# EAGLE board PIC_WIFI_DEV (EAGLE 6.2)
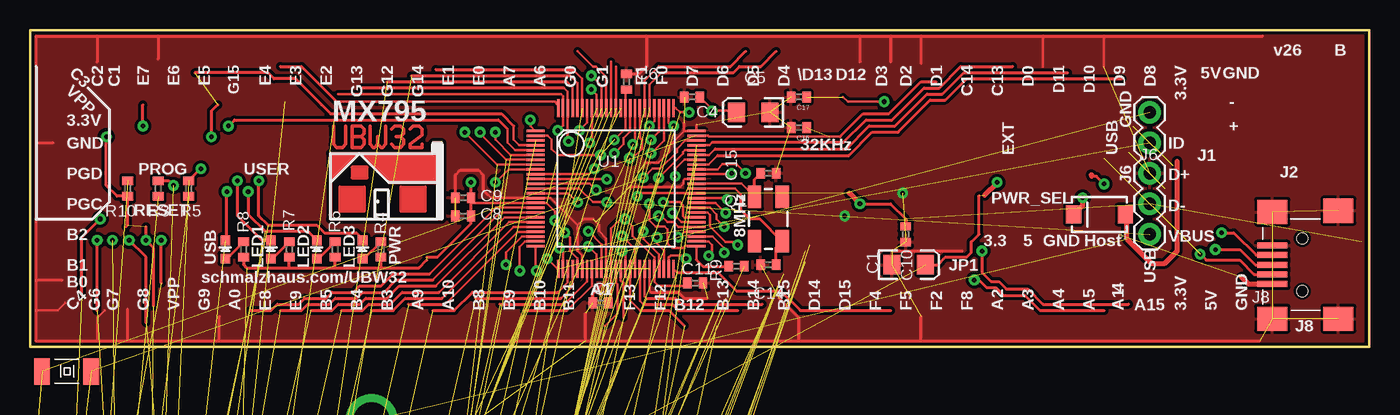
[diagram p0: board, top side]
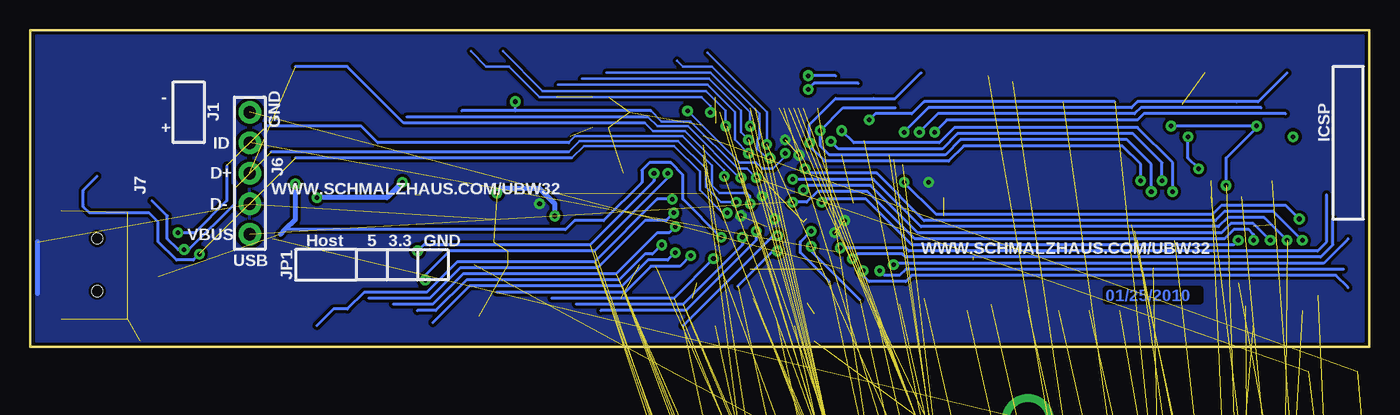
[diagram p1: board, bottom side, seen from below]

Size 111.51 x 26.42 mm. Coordinates in mm from the lower left corner, seen from the top.
Outline: 0,26.42 111.51,26.42 111.51,0 0,0 0,26.42
Copper layers (1*16): Top 0.035mm / dielectric 1.5mm / Bottom 0.035mm
Design rules: minimum track width 7mil, minimum drill 15mil, track to track 8mil, track to pad 8mil, pad to pad 8mil, via to via 8mil, smd to smd 8mil, copper to edge 10mil, drill to drill 8mil, minimum pad ring 12mil, minimum via ring 10mil, stop-mask expansion 4mil, vias tented up to drill 25mil, thermal gap 10mil

## Footprints (pad centres in the part's own frame; a part is rotated, then mirrored left to right if it is on the bottom)
EIA3216 = smd 1.4 x 1.6: A 1.4,0; C -1.4,0
C0402 = smd 0.7 x 0.9: 1 -0.65,0; 2 0.65,0
0603-CAP = smd 1.1 x 1: 1 -0.85,0; 2 0.85,0
SMA-DIODE = smd 1.27 x 1.47: A -2.15,0; C 2.15,0
M1206 = smd 1.6 x 2: 1 -1.4,0; 2 1.4,0
POWER_JACK_PTH = drill 2.997 pad 4.318: GND 0,7.7; GNDBREAK 4.7,10.7; PWR 0,13.7
1X05 = drill 1.016 pad 1.88: 1 0,0; 2 2.54,0; 3 5.08,0; 4 7.62,0; 5 10.16,0
USB-MINIB = smd 2.5 x 0.5: D+ 2.5,0; D- 2.5,0.8; GND 2.5,-1.6; ID 2.5,-0.8; VBUS 2.5,1.6 | smd 2.5 x 2: G1 -3,4.5; G2 2.5,4.5; G3 -3,-4.5; G4 2.5,-4.4 | hole 0.9: 0,2.2; 0,-2.2
1X02 = drill 1.016 pad 1.88: 1 0,0; 2 2.54,0
1X20 = drill 1.016 pad 1.88 square: 1 0,0 | drill 1.016 pad 1.88: 2 2.54,0; 3 5.08,0; 4 7.62,0; 5 10.16,0; 6 12.7,0; 7 15.24,0; 8 17.78,0; 9 20.32,0; 10 22.86,0; 11 25.4,0; 12 27.94,0; 13 30.48,0; 14 33.02,0; 15 35.56,0; 16 38.1,0; 17 40.64,0; 18 43.18,0; 19 45.72,0; 20 48.26,0
1X16 = drill 1.016 pad 1.88: 1 0,0; 2 2.54,0; 3 5.08,0; 4 7.62,0; 5 10.16,0; 6 12.7,0; 7 15.24,0; 8 17.78,0; 9 20.32,0; 10 22.86,0; 11 25.4,0; 12 27.94,0; 13 30.48,0; 14 33.02,0; 15 35.56,0; 16 38.1,0
1X15 = drill 1.016 pad 1.88: 1 0,0; 2 2.54,0; 3 5.08,0; 4 7.62,0; 5 10.16,0; 6 12.7,0; 7 15.24,0; 8 17.78,0; 9 20.32,0; 10 22.86,0; 11 25.4,0; 12 27.94,0; 13 30.48,0; 14 33.02,0; 15 35.56,0
LED-0603 = smd 0.8 x 0.8: A 0,-0.75; C 0,0.75
CRYSTAL-SMD-5X3 = smd 1.9 x 1.1: 1 -1.85,-1.15; 2 1.85,-1.15; 3 1.85,1.15; 4 -1.85,1.15
CRYSTAL-SMD-4X2 = smd 1.3 x 2.2: P$1 -2.05,0; P$2 2.05,0
0603-RES = smd 1.1 x 1: 1 -0.85,0; 2 0.85,0
SWITCH-OMRON = smd 1.6 x 1.4: 1 4,-2.25; 2 -4,-2.25; 3 4,2.25; 4 -4,2.25
TQFP100 = smd 0.2 x 1.5: 1 -4.8,-6.7; 2 -4.4,-6.7; 3 -4,-6.7; 4 -3.6,-6.7; 5 -3.2,-6.7; 6 -2.8,-6.7; 7 -2.4,-6.7; 8 -2,-6.7; 9 -1.6,-6.7; 10 -1.2,-6.7; 11 -0.8,-6.7; 12 -0.4,-6.7; 13 0,-6.7; 14 0.4,-6.7; 15 0.8,-6.7; 16 1.2,-6.7; 17 1.6,-6.7; 18 2,-6.7; 19 2.4,-6.7; 20 2.8,-6.7; 21 3.2,-6.7; 22 3.6,-6.7; 23 4,-6.7; 24 4.4,-6.7; 25 4.8,-6.7; 51 4.8,6.7; 52 4.4,6.7; 53 4,6.7; 54 3.6,6.7; 55 3.2,6.7; 56 2.8,6.7; 57 2.4,6.7; 58 2,6.7; 59 1.6,6.7; 60 1.2,6.7; 61 0.8,6.7; 62 0.4,6.7; 63 0,6.7; 64 -0.4,6.7; 65 -0.8,6.7; 66 -1.2,6.7; 67 -1.6,6.7; 68 -2,6.7; 69 -2.4,6.7; 70 -2.8,6.7; 71 -3.2,6.7; 72 -3.6,6.7; 73 -4,6.7; 74 -4.4,6.7; 75 -4.8,6.7 | smd 1.5 x 0.2: 26 6.7,-4.8; 27 6.7,-4.4; 28 6.7,-4; 29 6.7,-3.6; 30 6.7,-3.2; 31 6.7,-2.8; 32 6.7,-2.4; 33 6.7,-2; 34 6.7,-1.6; 35 6.7,-1.2; 36 6.7,-0.8; 37 6.7,-0.4; 38 6.7,0; 39 6.7,0.4; 40 6.7,0.8; 41 6.7,1.2; 42 6.7,1.6; 43 6.7,2; 44 6.7,2.4; 45 6.7,2.8; 46 6.7,3.2; 47 6.7,3.6; 48 6.7,4; 49 6.7,4.4; 50 6.7,4.8; 76 -6.7,4.8; 77 -6.7,4.4; 78 -6.7,4; 79 -6.7,3.6; 80 -6.7,3.2; 81 -6.7,2.8; 82 -6.7,2.4; 83 -6.7,2; 84 -6.7,1.6; 85 -6.7,1.2; 86 -6.7,0.8; 87 -6.7,0.4; 88 -6.7,0; 89 -6.7,-0.4; 90 -6.7,-0.8; 91 -6.7,-1.2; 92 -6.7,-1.6; 93 -6.7,-2; 94 -6.7,-2.4; 95 -6.7,-2.8; 96 -6.7,-3.2; 97 -6.7,-3.6; 98 -6.7,-4; 99 -6.7,-4.4; 100 -6.7,-4.8
RECOM = drill 1.016 long: GND 0,-2.54; VIN -2.54,-2.54; VOUT 2.54,-2.54
SMD_MRF = smd 0.85 x 0.8: 1 0.2,-1.73; 2 0.2,-3; 3 0.2,-4.27; 4 0.2,-5.54; 5 0.2,-6.81; 6 0.2,-8.08; 7 0.2,-9.35; 8 0.2,-10.62; 9 0.2,-11.89; 10 0.2,-13.16; 11 0.2,-14.43; 12 0.2,-15.7; 13 0.2,-16.97; 14 0.2,-18.24; 15 0.2,-19.51; 16 0.2,-20.78; 17 0.2,-22.05; 18 0.2,-23.32; 19 20.8,-23.32; 20 20.8,-22.05; 21 20.8,-20.78; 22 20.8,-19.51; 23 20.8,-18.24; 24 20.8,-16.97; 25 20.8,-15.7; 26 20.8,-14.43; 27 20.8,-13.16; 28 20.8,-11.89; 29 20.8,-10.62; 30 20.8,-9.35; 31 20.8,-8.08; 32 20.8,-6.81; 33 20.8,-5.54; 34 20.8,-4.27; 35 20.8,-3; 36 20.8,-1.73
SD_ALPS = smd 0.9 x 2.1: 1 6.255,22.6; 2 3.755,22.6; 3 1.255,22.6; 4 -1.245,22.6; 5 -3.745,22.6; 6 -6.245,22.6; 7 -8.67,22.6; 8 -10.37,22.6; 9 8.755,22.6 | smd 4.32 x 3.2: 12 -11.69,-3.05; 13 12.09,-3.05 | smd 0.8 x 1.2: CD -11.97,22.45 | smd 1.13 x 0.9: VSS -13.285,14.88 | smd 1.13 x 1.5: WP -13.285,1.57 | hole 1.4: 11.97,0; -11.97,0

## Placement (x,y rotation side)
C1  10uF  [EIA3216]  73.15,6.86 0 top
C4  0.1uF  [C0402]  55.12,20.83 180 top
C5  10uF  [EIA3216]  60.2,19.56 180 top
C6  0.1uF  [C0402]  49.66,22.1 90 top
C7  0.1uF  [C0402]  47.5,3.68 180 top
C8  0.1uF  [C0402]  36.07,10.92 180 top
C9  0.1uF  [C0402]  36.07,12.45 180 top
C10  0.1uF  [C0402]  72.9,9.4 270 top
C11  0.1uF  [C0402]  55.37,5.33 0 top
C14  18pF  [C0402]  61.47,6.86 0 top
C15  18pF  [C0402]  61.47,14.48 180 top
C16  11pf  [C0402]  64.01,18.29 180 top
C17  11pf  [C0402]  64.01,20.83 180 top
C19  1uF  [0603-CAP]  1.78,-50.29 0 top  (outside the outline)
D1  [SMA-DIODE]  89.03,11.05 180 top
F2  500mA PTC Fuse  [M1206]  18.29,-40.13 0 top  (outside the outline)
J5  POWER_JACKPTH  [POWER_JACK_PTH]  28.45,-19.81 0 top  (outside the outline)
J6  [1X05]  93.22,9.4 90 top
J8  [USB-MINIB]  105.92,6.86 180 top
JP1  [1X02]  1.78,-56.64 0 top  (outside the outline)
JP2  M20  [1X20]  -31.24,-167.13 0 top  (outside the outline)
JP3  M16PTH  [1X16]  -31.24,-197.61 0 top  (outside the outline)
JP4  M20  [1X20]  -31.24,-182.37 0 top  (outside the outline)
JP5  M15  [1X15]  -31.24,-189.99 0 top  (outside the outline)
LED1  WHITE  [LED-0603]  20.07,8.13 0 top
LED2  RED  [LED-0603]  23.88,8.13 0 top
LED3  YELLOW  [LED-0603]  27.69,8.13 0 top
PWR1  BLUE  [LED-0603]  9.4,-50.29 0 top  (outside the outline)
Q1  8MHz  [CRYSTAL-SMD-5X3]  61.47,10.67 90 top
Q2  32.768KHz  [CRYSTAL-SMD-4X2]  3.05,-2.03 0 top
R1  4.7K  [C0402]  1.78,-82.04 0 top  (outside the outline)
R2  4.7K  [C0402]  1.78,-85.85 0 top  (outside the outline)
R3  4.7K  [C0402]  10.67,13.21 90 top
R4  330  [C0402]  29.21,8.13 270 top
R5  4.7K  [C0402]  13.21,13.21 90 top
R6  330  [C0402]  25.4,8.13 270 top
R7  330  [C0402]  21.59,8.13 270 top
R8  330  [C0402]  17.78,8.13 270 top
R9  4.7K  [C0402]  58.8,6.73 0 top
R10  4.7K  [C0402]  8.13,13.21 270 top
R11  4.7K  [C0402]  1.78,-89.66 0 top  (outside the outline)
R12  4.7K  [0603-RES]  33.53,-130.3 0 top  (outside the outline)
R13  4.7K  [0603-RES]  37.34,-130.3 0 top  (outside the outline)
R14  4.7K  [0603-RES]  41.15,-130.3 0 top  (outside the outline)
R15  4.7K  [0603-RES]  1.78,-160.78 0 top  (outside the outline)
R16  4.7K  [0603-RES]  5.59,-160.78 0 top  (outside the outline)
R17  4.7K  [0603-RES]  9.4,-160.78 0 top  (outside the outline)
R18  4.7K  [0603-RES]  13.21,-160.78 0 top  (outside the outline)
R19  4.7K  [0603-RES]  17.02,-160.78 0 top  (outside the outline)
R20  4.7K  [C0402]  -32.51,-202.69 0 top  (outside the outline)
R50  330  [0603-RES]  5.59,-50.29 0 top  (outside the outline)
RESET  [SWITCH-OMRON]  5.59,-76.96 0 top  (outside the outline)
U1  PIC32MX460F512L TQFP100  [TQFP100]  48.77,13.21 270 top
U4  RECOM_X.X_REG78XX  [RECOM]  6.86,-28.7 0 top  (outside the outline)
U$1  MRF24WB0MA  [SMD_MRF]  -22.35,-121.41 0 top  (outside the outline)
U$2  SD_CARD_SOCKETALPS  [SD_ALPS]  17.02,-153.16 0 top  (outside the outline)
U$3  [UBW32]  29.59,17.91 0 top
U$5  [SCHMALZHAUS]  28.83,13.21 0 top
USB  GREEN  [LED-0603]  16.26,8.13 0 top
USER1  [SWITCH-OMRON]  5.59,-61.72 0 top  (outside the outline)
USER2  [SWITCH-OMRON]  5.59,-69.34 0 top  (outside the outline)

## Library data of the parts
C1 C5 C10 J8 = SparkFun02-20-08
C4 C6-C9 C11 C14-C17 LED1-LED3 PWR1 R1-R11 R20 USB = SparkFun
C19 R12-R19 R50 = SparkFun-Passives
D1 J6 = SparkFun-12-01-09
F2 = resistor
J5 Q2 RESET U4 U$1 U$2 USER1 USER2 = lizardworx
JP1-JP5 = SparkFun-Connectors
Q1 = SparkFun11_03_09
U1 = SchmalzHaus
U$3 U$5 = UBW32

## Nets
3.3V: C6.1 C7.1 C8.1 C9.1 C10.1 C11.1 F2.1 J6.2 JP3.2 JP5.14 R1.2 R2.2 R4.2 R6.2 R7.2 R8.2 R11.2 R12.2 R13.2 R14.2 R15.1 R16.2 R19.2 R20.2 R50.2 U1.2 U1.16 U1.30 U1.37 U1.46 U1.55 U1.62 U1.86 U$1.17 U$1.29 U$2.4
D+: J8.D+ U1.57
D-: J8.D- U1.56
GND: C1.C C4.2 C5.C C6.2 C7.2 C8.2 C9.2 C10.2 C11.2 C14.1 C15.1 C16.2 C17.2 C19.2 J5.GND J5.GNDBREAK J6.3 J8.G1 J8.G2 J8.G3 J8.G4 J8.GND JP1.2 JP3.1 JP5.15 PWR1.C R17.1 RESET.1 RESET.2 U1.15 U1.31 U1.36 U1.45 U1.65 U1.75 U4.GND U$1.1 U$1.10 U$1.18 U$1.19 U$1.25 U$1.28 U$1.30 U$1.36 U$2.3 U$2.6 U$2.12 U$2.VSS USER1.1 USER1.2 USER2.1 USER2.2
N$1: R1.1 R10.1
N$2: D1.A J5.PWR JP1.1
N$3: R2.1 R5.1
N$4: R3.1 R11.1
N$5: R15.2 U$1.4
N$6: R9.2 R20.1
N$10: R18.1 R19.1
N$19: PWR1.A R50.1
N$20: R8.1 USB.A
N$22: LED1.A R7.1
N$23: LED2.A R6.1
N$24: C19.1 F2.2 U4.VOUT
N$35: LED3.A R4.1
N$110: C4.1 C5.A U1.85
OSC1: C14.2 Q1.1 U1.63
OSC2: C15.2 Q1.3 U1.64
PGC: J6.5 U1.26
PGD: J6.4 U1.27
RA0: JP4.5 U1.17
RA1: JP4.16 U1.38
RA2: JP5.9 U1.58
RA4: JP5.10 U1.60
RA5: JP5.11 U1.61
RA6: JP2.4 U1.91
RA7: JP2.5 U1.92
RA9: JP4.10 U1.28
RA10: JP4.11 U1.29
RA14: JP5.12 U1.66
RA15: JP5.13 U1.67
RB0: U1.25
RB1: U1.24
RB2: U1.23
RB3: JP4.9 U1.22
RB4: JP4.8 U1.21
RB5: JP4.7 U1.20
RB8: JP4.12 U1.32
RB9: JP4.13 U1.33
RB10: JP4.14 U1.34
RB11: JP4.15 U1.35
RB12: JP4.19 U1.41
RB13: JP4.20 U1.42
RB14: JP5.1 U1.43
RB15: JP5.2 U1.44
RC1: JP2.18 U1.6
RC2: JP2.19 U1.7
RC3: JP2.20 U1.8
RC13: C17.1 JP3.6 Q2.P$2 U1.73
RC14: C16.1 JP3.7 Q2.P$1 U1.74
RD1: JP3.8 U1.76
RD2: JP3.9 U1.77
RD3: JP3.10 U1.78
RD4: JP3.13 U1.81
RD5: JP3.14 U1.82
RD6: JP3.15 U1.83
RD7: JP2.1 U1.84
RD8: JP3.3 U1.68
RD9: JP3.4 U1.69
RD11: JP3.5 U1.71
RD12: JP3.11 U1.79
RD13: JP3.12 U1.80
RD14: JP5.3 U1.47
RD15: JP5.4 U1.48
RE0: JP2.6 LED3.C U1.93
RE1: JP2.7 LED2.C U1.94
RE2: JP2.11 LED1.C U1.98
RE3: JP2.12 U1.99 USB.C
RE4: JP2.13 U1.100
RE5: JP2.15 U1.3
RE6: JP2.16 R5.2 U1.4 USER2.3 USER2.4
RE7: JP2.17 R3.2 U1.5 USER1.3 USER1.4
RE9: JP4.6 U1.19
RF2: JP5.7 U1.52
RF4: JP5.5 U1.49
RF5: JP5.6 U1.50
RF8: JP5.8 U1.53
RF12: JP4.18 U1.40
RF13: JP4.17 U1.39
RG0: JP2.3 U1.90
RG1: JP2.2 U1.89
RG9: JP4.4 U1.14
RG15: JP2.14 U1.1
SD_CD: JP2.9 U1.96 U$2.CD
SD_CK: JP4.1 U1.10 U$2.5
SD_CS: JP2.8 R18.2 U1.95 U$2.1
SD_DI: JP4.3 U1.12 U$2.2
SD_DO: JP4.2 U1.11 U$2.7
SD_WP: JP2.10 U1.97 U$2.WP
USBID: J8.ID R9.1 U1.51
VBUS: J8.VBUS U1.54
VIN_RAW: C1.A D1.C U4.VIN
VPP: J6.1 R10.2 RESET.3 RESET.4 U1.13
WF_CK: R13.1 U1.70 U$1.34
WF_CS: U1.59 U$1.23
WF_DI: R12.1 U1.72 U$1.35
WF_DO: U1.9 U$1.32
WF_HIBERNATE: U1.88 U$1.20
WF_INT: R14.1 U1.18 U$1.33
WF_RESET: R16.1 U1.87 U$1.7
WF_WP: R17.2 U$1.16

## Tracks (layer width: path | path; a pad name or v marks a point on that pad's centre or on a via)
3.3V  (via drill 0.38)  (27 unrouted)
  Top 0.203: v48.64,17.27 49.57,18.2 U1.86 49.57,21.36 arc-90 C6.1 | v43.69,10.54 43.69,11.3 42.98,12.01 U1.16 36.77,12.01 | v44.51,9.52 44.58,9.52 44.96,9.14 44.96,8 45.57,7.39 U1.30 | U1.2 43.1,17.61 43.43,17.27 43.43,16.51 43.94,16 v47.5,16 | 48.37,3.92 U1.37 48.37,9.89 49.15,10.67 v49.53,10.67 50.16,10.03 50.16,9.27 51.97,7.47 U1.46 51.97,5.44 52.32,5.08 54.48,5.08 54.74,5.33 C11.1 | U1.62 54.5,12.81 54.48,12.83 50.8,12.83 v50.55,12.57 | U1.55 54,10.01 53.59,10.41 53.09,10.41 52.58,10.92 v52.32,10.92
  Top 0.254: v36.7,13.72 36.72,13.7 C9.1 36.7,12.45 36.7,11.94 | 36.7,10.92 C8.1 | 36.7,10.92 36.7,11.94 | 36.7,11.94 36.77,12.01 | 36.7,10.92 36.7,10.29 33.91,7.49 33.02,7.49 | 21.59,6.6 25.4,6.6 | 25.4,6.6 29.21,6.6 | 33.02,7.24 32.38,6.6 29.21,6.6 | 29.21,6.6 R4.2 | 25.4,6.6 R6.2 | 21.59,6.6 R7.2 | R8.2 17.78,6.87 18.05,6.6 21.59,6.6 | C7.1 48.13,3.68 48.37,3.92 | 72.88,10.03 C10.1 72.9,10.67 71.63,11.94 v69.09,11.94
  Top 0.406: 68.2,12.83 v69.09,11.94
  Bottom 0.406: 110.87,4.45 110.87,8.76
  pour Bottom (isolate 0.254): 0.51,0.51 0.51,25.91 111,25.91 111,0.51
D+  (via drill 0.38)  (1 unrouted)
  Top 0.203: U1.57 54.47,10.81 54.36,10.92 54.36,11.81 54.1,12.07 v52.71,12.07
  Top 0.254: J8.D+ 101.98,6.86 100.71,8.13 v98.68,8.13
  Bottom 0.203: 66.67,16.26 65.76,17.17 57.56,17.17 55.25,14.86 55.25,13.34 53.98,12.07 v52.71,12.07
  Bottom 0.254: 66.67,16.26 91.44,16.26 | 94.49,13.21 94.49,11.94 98.3,8.13 v98.68,8.13 99.19,8.13 100.08,9.02 100.08,10.92 101.36,12.21
D-  (via drill 0.38)  (1 unrouted)
  Top 0.203: U1.56 54.23,10.41 v53.47,11.18
  Top 0.254: v97.41,7.75 97.92,7.24 100.71,7.24 101.89,6.06 J8.D-
  Bottom 0.203: 66.42,15.75 65.41,16.76 61.47,16.76 57.91,16.76 55.75,14.61 55.75,13.08 53.85,11.18 v53.47,11.18
  Bottom 0.254: 66.42,15.75 89.41,15.75 | 105.93,14.21 107.06,13.08 107.06,11.68 106.55,11.18 101.6,11.18 100.84,10.41 100.84,8.76 99.31,7.24 97.92,7.24 v97.41,7.75
GND  (via drill 0.38)  (50 unrouted)
  Top 0.203: 38.1,12.7 38.39,12.41 U1.15 43.35,12.41 45.59,10.16 | 46.86,4.45 47.97,5.55 U1.36 47.97,9.05 47.37,9.65 47.37,10.16 47.12,10.41 | U1.45 51.57,4.69 51.69,4.57 | 54.46,18.01 53.21,16.76 53.21,16.26 52.32,15.37 51.18,15.37 | U1.31 45.97,7.63 45.59,8 45.59,10.16 | 45.59,10.16 46.1,10.67 46.86,10.67 | 55.47,18.51 U1.75 54.46,18.01 | U1.65 54.54,14.01 54.39,13.86 54.39,13.63 54.1,13.34 49.91,13.34 | 54.46,18.01 54.46,18.68 | 89.41,25.91 89.41,23.37 | 84.33,25.91 84.33,23.37 | 5.59,0.51 5.59,2.41 6.22,3.05 | 0.51,3.05 2.29,3.05 2.92,3.68
  Top 0.254: C9.2 35.42,14.34 35.81,14.73 37.34,14.73 37.72,14.35 37.72,13.08 38.1,12.7 | C7.2 46.86,3.68 46.86,4.45 | 51.69,4.57 53.98,4.57 54.48,4.06 56.39,4.06 | C6.2 50.69,22.75 51.31,23.37 51.31,25.91 | 51.31,25.91 69.09,25.91 | 69.09,25.91 69.09,23.75 | 5.59,25.91 0.51,25.91 0.51,17.02 | 5.59,25.91 10.67,25.91 | 10.67,25.91 51.31,25.91 | 0.51,5.59 0.51,3.05 0.51,0.51 5.59,0.51 8.13,0.51 | 0.51,5.59 0.51,17.02 | 8.13,0.51 15.75,0.51 | 15.75,0.51 46.23,0.51 | 46.23,0.51 64.01,0.51 | 64.01,0.51 74.17,0.51 | 74.17,0.51 102.36,0.51 | 69.09,25.91 71.63,25.91 | 71.63,25.91 74.17,25.91 | 74.17,25.91 84.33,25.91 89.41,25.91 102.62,25.91 | 46.23,0.51 46.23,2.79 | 64.01,0.51 64.01,2.41 62.36,4.06 | 5.59,25.91 5.59,23.75 | 0.51,17.02 1.91,17.02 | 0.51,5.59 2.67,5.59 | 8.13,0.51 8.13,3.17 | 15.75,0.51 15.75,2.54 | 74.17,0.51 74.17,2.54 | 10.67,25.91 10.67,24 | 71.63,25.91 71.63,23.75 | 74.17,25.91 74.17,23.62 | 71.75,8 77.6,8
  Bottom 0.406: v67.82,10.92 67.82,11.94 69.09,13.21 72.26,13.21 v72.64,12.83
  pour Top (isolate 0.254, rank 2): 0.51,25.91 0.51,0.51 111,0.51 111,25.91
N$1  (1 unrouted)
N$2  (2 unrouted)
  Top 0.406: 95.5,15.49 95.5,8 94.49,6.99 93.34,6.99 91.31,9.02 91.31,10.91 D1.A
N$3  (1 unrouted)
N$4  (1 unrouted)
N$5  (1 unrouted)
N$6  (1 unrouted)
N$10  (1 unrouted)
N$19  (1 unrouted)
N$20
  Top 0.254: USB.A 16.39,7.38 17.78,8.76 17.65,8.76 17.67,8.78 R8.1
N$22
  Top 0.254: R7.1 21.59,8.76 20.2,7.38 LED1.A
N$23
  Top 0.254: R6.1 25.4,8.76 24.02,7.38 LED2.A
N$24  (2 unrouted)
N$35
  Top 0.254: R4.1 29.21,8.76 27.82,7.38 LED3.A
N$110  (via drill 0.38)
  Top 0.203: U1.85 49.97,17.96 49.4,17.4 49.4,16.89 v48.64,16.13 | C5.A 58.67,19.68 v56.77,19.68 56.77,19.83 C4.1
  Bottom 0.203: v48.64,16.13 48.64,15.88 49.66,14.86 50.55,14.86 51.05,15.37 52.45,15.37 v56.77,19.68
OSC1
  Top 0.203: U1.63 58.67,13.21 59.18,12.7
  Top 0.254: 59.18,12.7 59.18,11.43 59.94,10.67 60.77,10.67 Q1.1 62.12,8.32 C14.2
OSC2
  Top 0.203: U1.64 59.23,13.61 Q1.3
  Top 0.254: Q1.3 60.32,13.98 C15.2
PGC  (via drill 0.38)  (1 unrouted)
  Top 0.203: U1.26 43.92,6.5 v43.05,7.37
  Bottom 0.254: 3.05,10.67 3.05,8.51 4.06,7.49 38.61,7.49 38.86,7.75 42.67,7.75 v43.05,7.37
PGD  (via drill 0.38)  (1 unrouted)
  Top 0.203: U1.27 44.37,7.92 44.07,8.22 v44.07,8.25
  Bottom 0.254: v44.07,8.25 38.61,8.25 38.35,8 4.32,8 3.56,8.76 3.56,12.7
RA0  (1 unrouted)
  Top 0.203: U1.17 38.79,11.61 33.27,6.1
  Top 0.254: 33.27,6.1 30.23,6.1 29.21,5.08 27.43,5.08 26.92,4.57 25.15,4.57 24.64,4.06 22.86,4.06 22.35,3.56 20.57,3.56 20.07,3.05 18.29,3.05
RA1  (1 unrouted)
  Top 0.203: U1.38 48.77,5.33 48.9,5.21 48.9,2.79 47.88,1.78
RA2  (via drill 0.38)  (1 unrouted)
  Top 0.203: U1.58 56.39,11.21 56.61,10.98 56.61,10.07 57.91,8.76 58.67,8.76 v58.93,8.51
  Bottom 0.254: v58.93,8.51 59.69,7.75 60.33,7.75 62.48,5.59 75.18,5.59 77.72,3.05 79.25,3.05
RA4  (via drill 0.38)  (1 unrouted)
  Top 0.203: U1.60 57.08,12.01 v57.91,11.18
  Bottom 0.254: 83.31,4.06 78.23,4.06 75.69,6.6 64.26,6.6 60.33,10.54 58.55,10.54 v57.91,11.18
RA5  (via drill 0.38)  (1 unrouted)
  Top 0.203: U1.61 57.95,12.41 v58.04,12.32
  Bottom 0.254: v58.04,12.32 59.31,12.32 64.52,7.11 75.95,7.11 78.49,4.57 83.69,4.57 85.09,3.17 86.23,3.17 87.63,1.78
RA6  (via drill 0.38)  (1 unrouted)
  Top 0.203: U1.91 47.57,21.77 v46.74,22.61
  Bottom 0.254: 44.45,22.61 v46.74,22.61
RA7  (via drill 0.38)  (1 unrouted)
  Top 0.203: U1.92 47.17,21.03 v46.74,21.46
  Bottom 0.254: 42.55,21.97 46.23,21.97 v46.74,21.46
RA9  (1 unrouted)
  Top 0.203: U1.28 44.77,5.4 43.94,4.57
  Top 0.254: 43.94,4.57 36.83,4.57 35.31,3.05 33.53,3.05
RA10  (1 unrouted)
  Top 0.203: U1.29 45.17,5.04 44.2,4.06
  Top 0.254: 37.08,4.06 44.2,4.06
RA14  (via drill 0.38)  (1 unrouted)
  Top 0.203: U1.66 58.35,14.41 v58.42,14.48
  Top 0.254: 89.41,3.05 84.07,3.05 82.8,4.32 81.03,4.32 80.39,4.95 79.63,4.95 78.99,5.59 v78.61,5.59
  Bottom 0.254: v58.42,14.48 58.42,14.1 64.52,8 76.58,8 78.61,5.97 v78.61,5.59
RA15  (via drill 0.38)  (1 unrouted)
  Top 0.203: U1.67 57.23,14.81 57.66,15.24 58.8,15.24 v59.56,14.48
  Top 0.254: 91.44,3.56 84.33,3.56 83.06,4.83 81.28,4.83 80.64,5.46 80.01,5.46 79.25,6.22 v79.25,8
  Bottom 0.254: v59.56,14.48 59.56,13.84 64.9,8.51 78.74,8.51 v79.25,8
RB0  (via drill 0.38)
  Top 0.203: U1.25 42.07,6.45 v42.16,6.35
  Bottom 0.254: 1.78,4.95 2.79,5.97 38.1,5.97 38.61,5.46 41.66,5.46 42.16,5.97 v42.16,6.35
RB1  (via drill 0.38)
  Top 0.203: U1.24 41.22,8.81 40.77,8.36 v40.77,6.35
  Bottom 0.254: v40.77,6.35 40.39,5.97 39.12,5.97 38.61,6.48 2.16,6.48
RB2  (via drill 0.38)
  Top 0.203: U1.23 40.96,9.21 39.62,7.87 v39.62,6.86
  Bottom 0.254: v39.62,6.86 39.5,6.99 3.81,6.99 1.78,9.02
RB3  (1 unrouted)
  Top 0.203: U1.22 40.6,9.61 34.54,3.56
  Top 0.254: 31.5,3.56 34.54,3.56
RB4  (1 unrouted)
  Top 0.203: U1.21 40.23,10.01 34.29,4.06
  Top 0.254: 34.29,4.06 31.24,4.06 30.23,3.05 28.45,3.05
RB5  (1 unrouted)
  Top 0.203: U1.20 39.87,10.41 34.04,4.57
  Top 0.254: 34.04,4.57 30.99,4.57 29.97,3.56 28.19,3.56 27.69,3.05 25.91,3.05
RB8  (1 unrouted)
  Top 0.203: U1.32 46.37,5.47 44.45,3.56
  Top 0.254: 39.12,3.56 44.45,3.56
RB9  (1 unrouted)
  Top 0.203: U1.33 46.77,5.11 44.7,3.05
  Top 0.254: 41.15,3.05 44.7,3.05
RB10  (via drill 0.38)  (1 unrouted)
  Top 0.203: U1.34 47.17,7.7 v46.48,8.38
  Bottom 0.254: 42.42,3.94 46.48,8 v46.48,8.38
RB11  (via drill 0.38)  (1 unrouted)
  Top 0.203: U1.35 47.57,8.57 v46.48,9.65
  Bottom 0.254: v46.48,9.65 47.37,8.76 47.37,7.87 44.96,5.46
RB12  (1 unrouted)
  Top 0.203: U1.41 49.97,3.88 50.8,3.05
  Top 0.254: 50.8,3.05 53.21,3.05 54.48,1.78
RB13  (via drill 0.38)  (1 unrouted)
  Top 0.203: U1.42 50.37,8.18 v49.28,9.27
  Bottom 0.254: v49.28,9.27 49.66,9.27 50.04,8.89 57.15,1.78
RB14  (1 unrouted)
  Top 0.203: U1.43 50.77,3.84 51.05,3.56
  Top 0.254: 51.05,3.56 53.47,3.56 53.98,3.05 58.93,3.05
RB15  (1 unrouted)
  Top 0.203: U1.44 51.17,4.2 51.31,4.06
  Top 0.254: 51.31,4.06 53.72,4.06 54.23,3.56 60.96,3.56
RC1  (via drill 0.38)  (1 unrouted)
  Top 0.203: U1.6 40,16.01 38.73,17.27 v38.73,17.91
  Bottom 0.254: 6.86,22.86 9.27,20.45 11.05,20.45 19.3,20.45 19.81,19.94 36.7,19.94 v38.73,17.91
RC2  (via drill 0.38)  (1 unrouted)
  Top 0.203: U1.7 39.64,15.61 37.59,17.65
  Top 0.254: v37.47,17.91 37.47,17.78 37.59,17.65
  Bottom 0.254: 9.02,19.94 19.05,19.94 19.56,19.43 35.94,19.43 v37.47,17.91
RC3  (via drill 0.38)  (1 unrouted)
  Top 0.203: U1.8 38.89,15.21 v36.2,17.91
  Bottom 0.254: 6.99,19.43 18.8,19.43 19.3,18.92 35.18,18.92 v36.2,17.91
RC13  (via drill 0.38)  (3 unrouted)
  Top 0.203: U1.73 54.55,17.21 53.85,16.51 53.85,16.26 52.45,14.86 51.82,14.86 v51.05,14.1 | v71.12,20.45 68.07,20.45 67.69,20.83
  Bottom 0.203: 59.82,19.68 58.93,18.8 56.52,18.8 52.58,14.86 51.82,14.86 v51.05,14.1 | 71.12,19.68 v71.12,20.45
  Bottom 0.254: 59.82,19.68 71.12,19.68 75.56,19.68
RC14  (3 unrouted)
  Top 0.203: 67.44,17.53 66.55,17.53 56.52,17.53 56.43,17.61 U1.74
  Top 0.254: 67.44,17.53 69.34,19.43 71.5,19.43 74.17,22.1 75.44,22.1
RD1  (via drill 0.38)  (1 unrouted)
  Top 0.203: v54.86,19.56 54.1,19.56 53.75,19.91 U1.76
  Bottom 0.203: 74.8,24.64 73.53,23.37 71.63,23.37 69.09,20.83 55.63,20.83 54.86,20.07 v54.86,19.56
RD2  (via drill 0.38)  (1 unrouted)
  Top 0.203: U1.77 53.17,18.71 53.47,18.41 v53.59,18.41
  Bottom 0.203: 72.14,24.64 68.83,21.34 55.25,21.34 53.59,19.68 v53.59,18.41
RD3  (via drill 0.38)  (1 unrouted)
  Top 0.203: U1.78 52.77,17.21 v51.69,16.13
  Bottom 0.203: v51.69,16.13 52.83,17.27 52.83,19.56 55.12,21.84 67.56,21.84
RD4  (1 unrouted)
  Top 0.203: U1.81 51.57,21.85 52.58,22.86
  Top 0.254: 52.58,22.86 58.55,22.86 59.05,23.37 60.83,23.37 62.1,24.64
RD5  (1 unrouted)
  Top 0.203: U1.82 51.17,22.21 52.32,23.37
  Top 0.254: 52.32,23.37 58.29,23.37 59.56,24.64
RD6  (via drill 0.38)  (1 unrouted)
  Top 0.203: v49.91,15.75 50.16,15.75 50.93,16.51 50.93,17.27 50.77,17.43 U1.83
  Bottom 0.203: v49.91,15.75 50.16,15.75 50.93,16.51 50.93,17.27 50.8,17.4 50.8,19.43 54.74,23.37 57.15,23.37 57.66,23.88
RD7  (via drill 0.38)  (1 unrouted)
  Top 0.203: U1.84 50.37,17.07 50.19,16.89 v50.16,16.89
  Bottom 0.203: v50.16,16.89 50.16,19.56 55.12,24.51
RD8  (1 unrouted)
  Top 0.203: U1.68 56.48,15.21 57.25,15.97
  Top 0.254: 57.25,15.97 68.17,15.97 70.1,17.91 72.26,17.91 74.93,20.57 76.2,20.57 77.98,22.35 90.93,22.35
RD9  (via drill 0.38)  (1 unrouted)
  Top 0.203: v53.72,14.22 53.72,14.86 54.47,15.61 U1.69
  Bottom 0.203: v53.72,14.22 53.72,14.73 56.97,17.98 59.64,17.98 60.33,18.67
  Bottom 0.254: 60.33,18.67 80.39,18.67 85.09,23.37 89.41,23.37
RD11  (via drill 0.38)  (1 unrouted)
  Top 0.203: U1.71 54.51,16.41 54.36,16.26 54.36,16.13 v52.32,14.1
  Bottom 0.203: v52.32,14.1 52.45,14.1 56.74,18.39 59.28,18.39 60.07,19.18
  Bottom 0.254: 60.07,19.18 80.14,19.18
RD12  (via drill 0.38)  (1 unrouted)
  Top 0.203: U1.79 52.37,17.95 v51.69,17.27
  Bottom 0.203: v51.69,17.27 52.32,17.91 52.32,19.68 54.99,22.35 65.53,22.35
RD13  (via drill 0.38)  (1 unrouted)
  Top 0.203: U1.80 51.97,18.82 v51.56,18.41
  Bottom 0.203: v51.56,18.41 51.56,19.56 54.86,22.86 63.5,22.86
RD14  (via drill 0.38)  (1 unrouted)
  Top 0.203: v51.05,9.65 51.05,9.02 52.37,7.7 U1.47
  Bottom 0.254: 64.01,3.05 56.9,3.05 51.05,8.89 v51.05,9.65
RD15  (via drill 0.38)  (1 unrouted)
  Top 0.203: U1.48 52.77,8.06 52.2,8.64 v52.2,9.14
  Bottom 0.254: v52.2,9.14 52.2,8.51 57.15,3.56 66.04,3.56
RE0  (via drill 0.38)  (1 unrouted)
  Top 0.203: U1.93 46.77,17.18 v46.61,17.02
  Top 0.254: v19.05,13.84 19.05,10.92 19.81,10.16 23.88,10.16 24.51,9.52 27.18,9.52 27.69,9.02 LED3.C
  Bottom 0.254: v19.05,13.84 19.05,15.24 20.57,16.76 33.78,16.76 35.05,15.49 45.34,15.49 46.61,16.76 v46.61,17.02 46.61,18.54 44.45,20.7 41.28,20.7 39.5,20.7 37.34,22.86
RE1  (via drill 0.38)  (1 unrouted)
  Top 0.203: U1.94 46.37,18.68 v45.72,18.03
  Top 0.254: v18.16,12.95 18.16,11.05 19.56,9.65 23.11,9.65 23.88,8.89 LED2.C
  Bottom 0.254: 39.5,19.94 43.82,19.94 v45.72,18.03 45.72,16.76 44.96,16 35.31,16 34.04,17.27 20.19,17.27 18.16,15.24 v18.16,12.95
RE2  (via drill 0.38)  (1 unrouted)
  Top 0.203: 44.45,21.59 44.77,21.27 U1.98 44.77,17.08
  Top 0.254: 44.45,21.59 27.69,21.59 | v44.83,17.14 44.77,17.08 | v17.27,13.84 17.27,10.92 19.3,8.89 20.19,8.89 20.18,8.88 LED1.C
  Bottom 0.254: v44.83,17.14 44.2,16.51 35.56,16.51 34.29,17.78 19.68,17.78 17.27,15.37 v17.27,13.84
RE3  (via drill 0.38)  (1 unrouted)
  Top 0.203: 25.65,21.08 44.2,21.08 44.37,20.91 U1.99 44.37,18.46 v43.94,18.03
  Top 0.254: v16.38,12.95 16.38,9.27 16.26,9.14 USB.C
  Bottom 0.254: v43.94,18.03 42.93,17.02 35.81,17.02 34.54,18.29 19.3,18.29 16.38,15.37 v16.38,12.95
RE4  (1 unrouted)
  Top 0.203: U1.100 43.97,20.17 43.69,20.45 25.53,20.45
  Top 0.254: 20.83,23.37 22.61,23.37 25.53,20.45
RE5  (1 unrouted)
RE6  (via drill 0.38)  (4 unrouted)
  Top 0.203: U1.4 40.72,16.81 40.26,17.27 40.26,18.41
  Top 0.254: 13.72,22.86 19.81,22.86 20.32,22.35 22.1,22.35 24.26,20.19 25.02,19.43 39.24,19.43 40.26,18.41 | 15.62,20.19 15.11,19.68 v15.11,17.53 | v14.22,14.86 14.21,14.86 R5.2
  Bottom 0.254: v15.11,17.53 15.11,15.75 v14.22,14.86
RE7  (via drill 0.38)  (3 unrouted)
  Top 0.203: U1.5 40.36,16.41 39.75,17.02 39.75,18.16
  Top 0.254: 39.75,18.16 38.99,18.92 17.02,18.92 v16.51,18.41 | v9.4,18.41 9.4,20.19 | R3.2 11.54,13.86 v11.94,13.46
  Bottom 0.254: v16.51,18.41 v9.4,18.41 9.4,18.29 11.94,15.75 v11.94,13.46
RE9  (1 unrouted)
  Top 0.203: U1.19 39.51,10.81 33.78,5.08
  Top 0.254: 33.78,5.08 30.73,5.08 29.72,4.06 27.94,4.06 27.43,3.56 25.65,3.56 25.15,3.05 23.37,3.05
RF2  (via drill 0.38)  (1 unrouted)
  Top 0.203: U1.52 56.47,8.81 56.77,8.51 56.77,7.87 v56.52,7.62
  Bottom 0.254: v56.52,7.62 57.4,6.73 59.82,6.73 61.98,4.57 72.64,4.57
RF4  (via drill 0.38)  (1 unrouted)
  Top 0.203: U1.49 53.17,7.45 53.34,7.62 54.36,7.62 v54.61,7.37
  Bottom 0.254: v54.61,7.37 57.91,4.06 68.07,4.06
RF5  (1 unrouted)
  Top 0.203: U1.50 53.85,6.22
  Top 0.254: 71.63,3.05 64.14,3.05 62.48,4.7 58.8,4.7 57.28,6.22 53.85,6.22
RF8  (via drill 0.38)  (1 unrouted)
  Top 0.203: U1.53 56.83,9.21 57.79,8.25 v57.79,7.87
  Bottom 0.254: v57.79,7.87 58.42,7.24 60.07,7.24 62.23,5.08 74.93,5.08 77.98,2.03
RF12  (via drill 0.38)  (1 unrouted)
  Top 0.203: U1.40 49.57,7.71 v49.28,8
  Bottom 0.254: v49.28,8 49.66,8 52.58,5.08
RF13  (1 unrouted)
  Top 0.203: U1.39 49.17,5.57 49.4,5.33 49.4,2.41
RG0  (1 unrouted)
  Top 0.203: 45.59,24.64 46.86,23.37 47.12,23.37 47.97,22.52 U1.90
RG1  (1 unrouted)
  Top 0.203: U1.89 48.37,23.77
RG9  (via drill 0.38)  (1 unrouted)
  Top 0.203: U1.14 44.85,12.81 v45.59,12.07
  Top 0.254: 10.92,5.33 v10.92,8.89
  Bottom 0.254: v10.92,8.89 11.3,8.51 38.1,8.51 41.91,12.32 45.34,12.32 v45.59,12.07
RG15  (via drill 0.38)  (1 unrouted)
  Top 0.203: v41.66,18.92 41.66,18.41 U1.1
  Bottom 0.254: v41.66,18.92 41.15,19.43 38.1,19.43 37.08,20.45 21.21,20.45
SD_CD  (2 unrouted)
  Top 0.203: U1.96 45.57,22 44.96,22.61
  Top 0.254: 31.75,22.61 44.96,22.61
SD_CK  (via drill 0.38)  (2 unrouted)
  Top 0.203: U1.10 46.54,14.41 v46.99,14.86
  Top 0.254: 5.59,3.05 v5.59,8.89
  Bottom 0.254: v5.59,8.89 8,11.3 12.07,11.3 12.83,10.54 37.08,10.54 41.02,14.48 46.61,14.48 v46.99,14.86
SD_CS  (3 unrouted)
  Top 0.203: U1.95 45.97,22.36 45.21,23.11
  Top 0.254: 33.78,23.11 45.21,23.11
SD_DI  (via drill 0.38)  (2 unrouted)
  Top 0.203: U1.12 46.59,13.61 v47.12,13.08
  Top 0.254: 9.65,2.03 9.65,7.49 v8.25,8.89
  Bottom 0.254: v8.25,8.89 9.65,10.29 11.56,10.29 12.32,9.52 37.59,9.52 41.53,13.46 46.74,13.46 v47.12,13.08
SD_DO  (via drill 0.38)  (2 unrouted)
  Top 0.203: U1.11 47.97,14.01 v48.01,13.97
  Bottom 0.254: v6.86,8.89 8.76,10.8 11.81,10.8 12.57,10.03 37.34,10.03 41.28,13.97 v48.01,13.97
SD_WP  (2 unrouted)
  Top 0.203: U1.97 45.17,21.63 44.7,22.1
  Top 0.254: 29.72,22.1 44.7,22.1
USBID  (via drill 0.38)  (1 unrouted)
  Top 0.203: 55.47,7.27 U1.51 54.51,8.41 54.36,8.25 53.47,8.25 53.09,8.64 53.09,9.78 52.83,10.03 52.07,10.03 51.56,10.54 v51.56,11.94 | 58.29,6.73 R9.1
  Top 0.254: 58.29,6.73 56.01,6.73 55.47,7.27 | J8.ID 102.07,7.66 100.2,9.52 v99.19,9.52
  Bottom 0.203: 66.67,17.02 66.12,17.58 57.2,17.58 54.74,15.11 54.74,13.46 54.1,12.83 51.82,12.83 51.56,12.57 v51.56,11.94
  Bottom 0.254: 66.67,17.02 82.55,17.02 83.95,18.41 91.82,18.41 | 95.12,15.11 95.12,12.19 97.79,9.52 v99.19,9.52
VBUS  (via drill 0.38)  (1 unrouted)
  Top 0.203: U1.54 54.44,9.61 v53.98,9.14
  Top 0.254: 88.39,14.22 88.77,14.22 v89.41,13.59
  Top 0.406: J8.VBUS 101.42,5.26 100.84,5.84 | 88.32,14.35 88.39,14.35 88.39,14.22
  Bottom 0.254: v53.98,9.14 57.15,12.32 57.15,14.35 58.17,15.37 59.94,15.37 60.58,14.73 60.58,13.72 63.75,10.54 66.17,10.54 66.93,9.78 90.3,9.78
  Bottom 0.406: v89.41,13.59 89.41,10.67 90.3,9.78 90.68,9.4
VIN_RAW  (via drill 0.38)  (2 unrouted)
  Top 0.254: 78.99,12.62 78.99,9.4 78.36,8.76 78.36,7.87 77.98,7.49 76.2,7.49 75.57,6.86 C1.A | C1.A arc90 C1.A
  Top 0.406: v87.63,12.45 87.61,12.42 87.61,11.78 D1.C | 79.45,12.65 v80.52,13.72
  Bottom 0.406: v87.63,12.45 81.79,12.45 v80.52,13.72
VPP  (via drill 0.38)  (4 unrouted)
  Top 0.203: U1.13 45.72,13.21 46.86,12.07 v48.01,12.07
  Top 0.254: 10.29,3.43 10.29,8.25 v9.65,8.89 9.65,10.03 | v6.35,17.53 6.35,13.46 7.24,12.57 8.13,12.57 R10.2 8.13,10.16 8,10.03
  Bottom 0.254: v9.65,8.89 9.65,9.4 10.03,9.78 11.3,9.78 12.07,9.02 37.85,9.02 41.78,12.95 45.97,12.95 46.86,12.07 v48.01,12.07
WF_CK  (2 unrouted)
  Top 0.203: U1.70 56.52,16.01 57.03,16.52
  Top 0.254: 57.03,16.52 67.95,16.52 69.85,18.41 72.01,18.41 74.68,21.08 75.95,21.08 77.72,22.86 86.36,22.86
WF_CS  (via drill 0.38)  (1 unrouted)
  Top 0.203: U1.59 56.59,11.61 57.15,11.05 57.15,10.67 v57.79,10.03
  Bottom 0.254: 81.28,3.56 77.98,3.56 75.44,6.1 62.74,6.1 59.31,9.52 58.29,9.52 v57.79,10.03
WF_DI  (2 unrouted)
  Top 0.203: U1.72 56.56,16.81 56.81,17.06
  Top 0.254: 56.81,17.06 67.73,17.06 69.6,18.92 71.75,18.92 74.42,21.59 75.69,21.59 77.47,23.37 81.79,23.37
WF_DO  (via drill 0.38, 0.38 pad 0.25)  (1 unrouted)
  Top 0.203: U1.9 39.83,14.81 v38.73,13.72
  Top 0.254: 4.32,4.32 4.32,9.14 v5.84,10.67
  Bottom 0.254: v38.73,13.72 36.07,11.05 13.08,11.05 12.32,11.81 6.99,11.81 v5.84,10.67
WF_HIBERNATE  (1 unrouted)
  Top 0.203: U1.88 48.77,23.37
WF_INT  (2 unrouted)
  Top 0.203: U1.18 39.15,11.21 33.53,5.59
  Top 0.254: 33.53,5.59 30.48,5.59 29.46,4.57 27.69,4.57 27.18,4.06 25.4,4.06 24.89,3.56 23.11,3.56 22.61,3.05 20.83,3.05
WF_RESET  (2 unrouted)
WF_WP  (1 unrouted)

## Text on the board
Bottom: 01/25/2010
tPlace: v26 | B | C2 | C1 | E7 | E6 | E5 | G15 | E4 | E3 | E2 | G13 | G12 | G14 | E1 | E0 | A7 | A6 | G0 | G1 | F1 | F0 | D7 | D6 | D5 | D4 | D3 | D2 | D1 | C14 | C13 | D0 | D11 | D10 | D9 | D8 | 3.3V | 5V | GND | C3 | \D13 | D12 | VPP | - | 3.3V | MX795 | GND | + | GND | 32KHz | ID | EXT | USB | J1 | PROG | USER | J2 | PGD | J6 | D+ | PGC | PWR_SEL | D- | RESET | 8MHz | B2 | 3.3 | 5 | GND | Host | VBUS | B1 | USB | LED1 | LED2 | LED3 | PWR | JP1 | schmalzhaus.com/UBW32 | USB | B0 | A1 | 4 | A1 | 5 | G6 | G7 | G8 | VPP | G9 | A0 | E8 | E9 | B5 | B4 | B3 | A9 | A10 | B8 | B9 | B10 | B11 | F13 | F12 | B12 | B13 | B14 | B15 | D14 | D15 | F4 | F5 | F2 | F8 | A2 | A3 | A4 | A5 | A1 | 3.3V | 5V | GND | C4 | J8
bPlace: ICSP | - | GND | J1 | + | ID | J6 | D+ | WWW.SCHMALZHAUS.COM/UBW32 | J7 | D- | GND | 3.3 | 5 | Host | VBUS | WWW.SCHMALZHAUS.COM/UBW32 | USB | JP1
tValues: LM1117 | LM1117